# Altium PCB PCB_W-F-FC-H2XX.PcbDoc
Units mm, origin at the board's own origin, x right, y up, seen from the top; angles counter-clockwise.
Board outline 159.5 x 29.5 mm, 2 copper layers (Top Layer, Bottom Layer); 43 components, 36 nets, 115 pads, 12 vias.
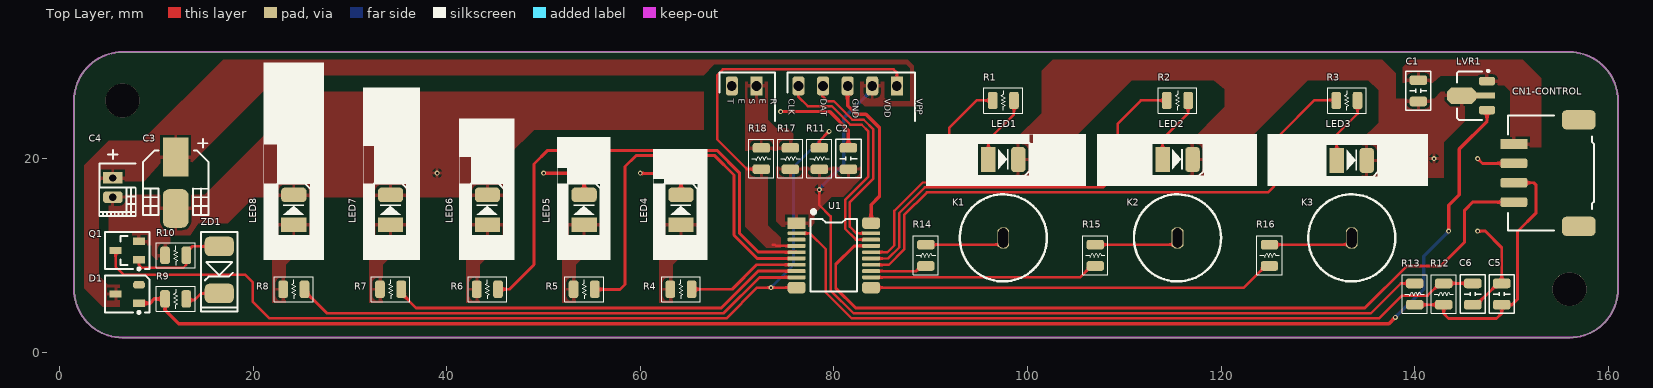
[diagram p0: Top Layer view]
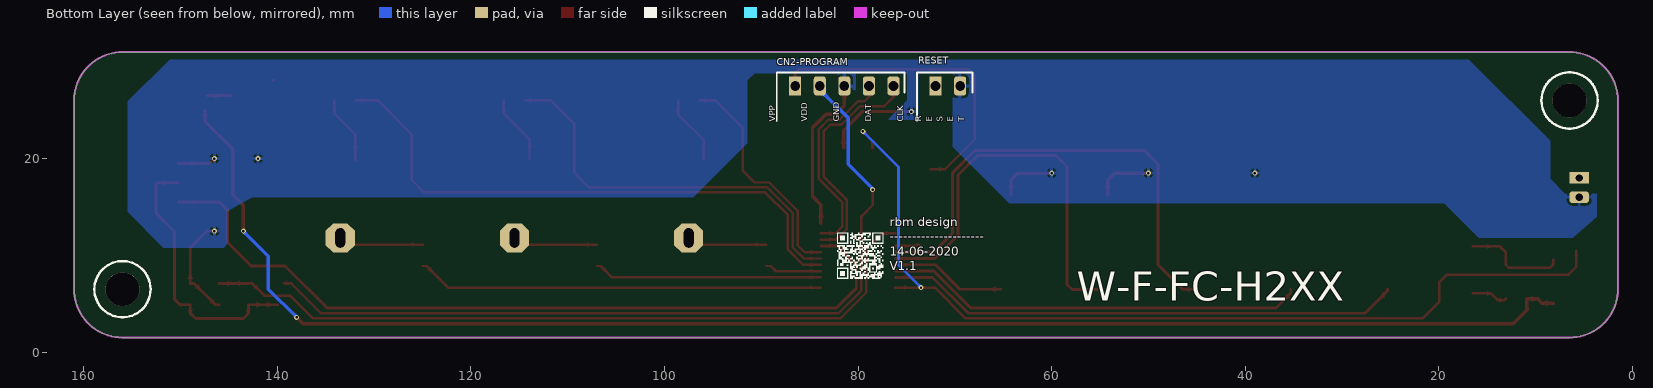
[diagram p1: Bottom Layer view, seen from below]
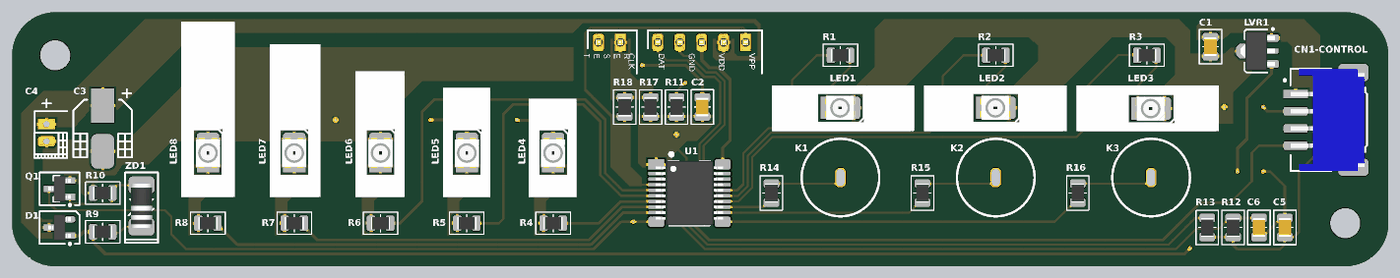
[diagram p2: 3D render of the assembled board from above, using the file's embedded part models]

## Layer stack, top to bottom
Top Solder: solder mask 0.0102, Solder Resist, Dk 3.5
Top Layer: signal copper 0.0356
Dielectric 1: dielectric 0.32, FR-4, Dk 4.8
Bottom Layer: signal copper 0.0356
Bottom Solder: solder mask 0.0102, Solder Resist, Dk 3.5

## Board outline
1.5,6.5 ccw(c6.5,6.5) 6.5,1.5 156,1.5 ccw(c156,6.5) 161,6.5 161,26 ccw(c156,26) 156,31 6.5,31 ccw(c6.5,26) 1.5,26

## Design rules (kind name [scope] priority, off if disabled: settings)
Clearance [All] p1: gap=0.254 ignorepadtopadclearanceinfootprint=FALSE except(0: Arc-Hole Track-Hole SMDPad-Hole THPad-Hole Via-Hole Fill-Hole Poly-Hole Region-Hole Text-Hole)
HoleSize [All] p1: absolutevalues=TRUE maxlimit=4 minlimit=0.025 maxpercent=80.000 minpercent=20.000
PlaneConnect [All] p1: planeconnectstyle=Relief reliefexpansion=0.508 reliefentries=4 reliefconductorwidth=0.35 reliefairgap=0.254
PolygonConnect [All] p1: connectstyle=Relief reliefconductorwidth=0.35 reliefentries=4 polygonreliefangle="90 Angle" airgapwidth=0.254
RoutingVias [All] p1: holewidth=0.254 width=0.5 viastyle="Through Hole" minholewidth=0.254 minwidth=0.5 maxholewidth=0.711 maxwidth=1.27
SolderMaskExpansion [All] p1: expansion=0.102 istentingtop=FALSE
UnRoutedNet [All] p1: checkbadconnections=TRUE
Width [All] p1: maxlimit=2 minlimit=0.254 preferedwidth=0.3 minimp=50.000000 maximp=50.000000 favimp=50.000000
27 further rules are at their usual default settings.

## Components (designator, comment, footprint, x,y, rotation, side; value= is the part's Value field where it differs from the comment)
C1 "0.33uF 25V 10%" C_0805 140.381,27 r270 top
C2 "0.1uF 16V 10%" C_0805 81.5,20 r90 top locked
C3 "100uF 16VDC 20%" C_SMD_6.3X5.4_CK-100UF-16V 12,17.5 r270 top
C4 "100uF 16VDC 20%" C_RADIAL_P2_RIGHT_ANGLE_WITHOUT_3D 5.5,17 r270 top
C5 "0.1uF 16V 10%" C_0805 149,6 r270 top locked
C6 "0.1uF 16V 10%" C_0805 146,6 r90 top locked
CN1-CONTROL "2mm 4Pins" CN_4P_A2001WR-S-XP-LCP 153,18.5 r0 top (schematic designator CN1)
CN2-PROGRAM "2.54mm Pins" CN_PIC_MCU_DEBUGGER_STRAIGHT 86.5,27.5 r90 bottom locked (schematic designator CN2)
D1 "If=200mA" D_SOT-23-3_200MA 7,6 r90 top locked
K1 "CapTouch Spring" K_TOUCHSPRING-12H-9W-0.6&1.3D 97.5,11.8 r0 top locked
K2 "CapTouch Spring" K_TOUCHSPRING-12H-9W-0.6&1.3D 115.5,11.8 r0 top locked
K3 "CapTouch Spring" K_TOUCHSPRING-12H-9W-0.6&1.3D 133.5,11.8 r0 top locked
LED1 "ICE-BLUE 3.2V 20mA" LED_SMD3528 97.5,19.9 r0 top locked
LED2 "BLUE 3.2V 20mA" LED_SMD3528 115.5,19.9 r0 top locked
LED3 "ORANGE 3.2V 20mA" LED_SMD3528 133.5,19.812 r0 top locked
LED4 "ICE-BLUE 3.2V 20mA" LED_SMD3528 64.2,14.7 r90 top locked
LED5 "ICE-BLUE 3.2V 20mA" LED_SMD3528 54.2,14.7 r90 top locked
LED6 "ICE-BLUE 3.2V 20mA" LED_SMD3528 44.2,14.7 r90 top locked
LED7 "ICE-BLUE 3.2V 20mA" LED_SMD3528 34.2,14.7 r90 top locked
LED8 "ICE-BLUE 3.2V 20mA" LED_SMD3528 24.2,14.7 r90 top locked
LVR1 "+5VDC 100mA" U_CJ78L05_SOT89 145.676,26.5 r180 top
Q1 "NPN 200mA" Q_SOT-23-3_NPN_BC847 7,10.5 r90 top locked
R1 "120Ω 1/8W 5%" R_0805 97.5,26 r0 top locked
R2 "120Ω 1/8W 5%" R_0805 115.5,26 r0 top locked
R3 "120Ω 1/8W 5%" R_0805 133,26 r0 top locked
R4 "120Ω 1/8W 5%" R_0805 64.2,6.5 r180 top locked
R5 "120Ω 1/8W 5%" R_0805 54.2,6.5 r180 top locked
R6 "120Ω 1/8W 5%" R_0805 44.2,6.5 r180 top locked
R7 "120Ω 1/8W 5%" R_0805 34.2,6.5 r180 top locked
R8 "120Ω 1/8W 5%" R_0805 24.2,6.5 r180 top locked
R9 "1KΩ 1/8W 5%" R_0805 12,5.5 r0 top locked
R10 "47KΩ 1/8W 5%" R_0805 12,10 r180 top locked
R11 "4.7KΩ 1/8W 5%" R_0805 78.5,20 r90 top locked
R12 "1KΩ 1/8W 5%" R_0805 143,6 r90 top locked
R13 "10KΩ 1/8W 1%" R_0805 140,6 r270 top locked
R14 "1KΩ 1/8W 5%" R_0805 89.5,10 r270 top locked
R15 "1KΩ 1/8W 5%" R_0805 107,10 r270 top locked
R16 "1KΩ 1/8W 5%" R_0805 125,10 r270 top locked
R17 "4.7KΩ 1/8W 5%" R_0805 75.5,20 r90 top locked
R18 "1KΩ 1/8W 5%" R_0805 72.5,20 r90 top locked
RESET "2P 2.54mm Male Connector" CN_PIC_MCU_RESETER_STRAIGHT 72,27.5 r90 bottom locked (schematic designator RE)
U1 "PIC16F18346T-I/SS" U_PIC_20PIN_SSOP 80,10 r0 top
ZD1 "4.3Vz 1W 217mA 5%" "ZD_ZM4742A LL-41" 16.5,8.5 r90 top locked

## Footprints (in the part's own frame and the unit in brackets; to place one, negate y for a bottom-side part, rotate by r counter-clockwise, add the part's x,y. Pads: shape width x height; smd on the part's side, far side on the other; paste and mask are expansions set on the pad)
C_0805 [mm]
  rrect50% 1x1.8 smd: 1(-1.1,0) 2(1.1,0)
  silkscreen extent -2,-1.3 2,1.3, body extent -1.1,-0.72 1.1,0.73, height 1
C_RADIAL_P2_RIGHT_ANGLE_WITHOUT_3D [mm] "Ø5*11mm 2mm Pitch RA"
  rect 1.2x2 hole 0.75: 1(-1,0)
  rrect50% 1.2x2 hole 0.75: 2(1,0)
  silkscreen extent -3.87,-1.4 2.93,2.37
C_SMD_6.3X5.4_CK-100UF-16V [mm] "Aluminum Electrolytic Capacitor, Body 6.60x6.70x6.00mm, IPC Low Density"
  rect 4x2.65 smd: 1(-2.65,0)
  rrect50% 4x2.65 smd: 2(2.65,0)
  silkscreen extent -4.55,-3.4 3.35,3.4, body extent -3.4,-3.4 3.4,3.4, height 5.8
CN_4P_A2001WR-S-XP-LCP [mm]
  rrect50% 3.5x2 smd: 0(3.95,-5.5) 0(3.95,5.5)
  rect 2.8x1 smd: 1(-2.75,3)
  rrect50% 2.8x1 smd: 2(-2.75,1) 3(-2.75,-1) 4(-2.75,-3)
  round 0.5 on Top Overlay: ""(-4,4.6)
  silkscreen extent -3.35,-5.94 5.51,5.95, body extent -3.35,-5.95 5.25,5.95, height 5.6
CN_PIC_MCU_DEBUGGER_STRAIGHT [mm] "2.54mmPitch, 5pins, StraightType, Male Connector"
  rect 2x1.25 hole 1: 1(0,0)
  rrect50% 2x1.25 hole 1: 2(0,-2.54) 3(0,-5.08) 4(0,-7.62) 5(0,-10.16)
  silkscreen extent -3.6,-11.3 1.4,1.91, body extent -1.24,-11.43 1.25,1.27, height 8.54
CN_PIC_MCU_RESETER_STRAIGHT [mm] "2.54mmPitch, 2pins, StraightType, Male Connector"
  rect 2x1.25 hole 1: 1(0,0)
  rrect50% 2x1.25 hole 1: 2(0,-2.54)
  silkscreen extent -3.6,-3.8 1.4,1.91, body extent -1.24,-3.81 1.25,1.27, height 8.54
D_SOT-23-3_200MA [mm] "Diodes - General Purpose 100V 200mA 1.25V @ 200mA SOT-23(SOT-23-3) RoHS"
  oct 0.75x1.25 smd: 0(0.95,-1.2)
  rect 0.75x1.25 smd: 1(-0.95,-1.2) 2(0,1.2)
  silkscreen extent -2.02,-2.3 1.9,2.3, body extent -1.5,-1.3 1.5,1.3, height 1.15
K_TOUCHSPRING-12H-9W-0.6&1.3D [mm]
  oct 1.2x2.2 / inner oct 1x1 / far side oct 3x3 hole 2 slot 1 at 0 deg: 1(0,0)
  silkscreen extent -4.5,-4.5 4.5,4.5, body extent -4.5,-4.5 4.5,4.5, height 12
LED_SMD3528 [mm]
  rect 1.5x2.6 smd: 1(-1.55,0)
  rrect50% 1.5x2.6 smd: 2(1.55,0)
  silkscreen extent -2.7,-1.7 2.7,1.7, body extent -1.8,-1.4 1.7,1.4, height 1.95
Q_SOT-23-3_NPN_BC847 [mm] "SOT23, 3-Leads, Body 2.90x2.45mm, Pitch 0.95mm, IPC Medium Density"
  rect 0.75x1.25 smd: 1(-0.95,-1.2) 2(0.95,-1.2) 3(0,1.2)
  silkscreen extent -2.02,-2.3 1.9,2.3, body extent -1.5,-1.3 1.5,1.3, height 1.15
R_0805 [mm]
  rrect50% 1x1.8 smd: 1(-1.1,0) 2(1.1,0)
  silkscreen extent -2,-1.3 2,1.3, body extent -1.1,-0.72 1.1,0.73, height 0.65
U_CJ78L05_SOT89 [mm] "SOT89, 3-Leads, Body 4.50x2.45mm, Pitch 1.50mm, Lead Span 4.1mm - Reverse Pinning, IPC Medium Density"
  rrect50% 1.65x0.9 smd: 1(-1.8,1.5) 3(-1.8,-1.5)
  rect 2x0.6 smd: 2(-1.6,0)
  oct 3x1.7 smd: 2(0.823,0)
  silkscreen extent -2.03,-2.65 1.32,2.5, body extent -2.2,-2.3 1.8,2.3, height 1.6
U_PIC_20PIN_SSOP [mm] "SOP, 20-Leads, Body 7.20x5.30mm, Pitch 0.65mm, IPC Medium Density"
  rect 1.85x1.2 smd mask+0.2: 1(-3.85,3.33)
  rrect50% 1.85x0.395 smd mask+0.2: 2(-3.85,2.275) 3(-3.85,1.625) 4(-3.85,0.975) 5(-3.85,0.325) 6(-3.85,-0.325) 7(-3.85,-0.975) 8(-3.85,-1.625) 9(-3.85,-2.275) 12(3.85,-2.275) 13(3.85,-1.625) 14(3.85,-0.975) 15(3.85,-0.325) 16(3.85,0.325) 17(3.85,0.975) 18(3.85,1.625) 19(3.85,2.275)
  rrect50% 1.85x1.2 smd mask+0.2: 10(-3.85,-3.33) 11(3.85,-3.33) 20(3.85,3.33)
  silkscreen extent -2.4,-3.75 2.4,4.62, body extent -3.9,-3.75 3.9,3.75, height 2
"ZD_ZM4742A LL-41" [mm]
  rrect50% 2x3 smd: 1(-2.425,0) 2(2.425,0)
  silkscreen extent -4.3,-1.9 3.9,1.9, body extent -2.57,-1.23 2.58,1.23, height 2.46

## Part data
C1 C2 C5 C6: library part "Capacitor Non-Polar", "Multilayer Ceramic Capacitors, SMD 0805"
C3: library part "Capacitor Polar", "Aluminum Electrolytic Capacitor, SMD ØDxL=6.3x5.4mm"
C4: library part "Capacitor Polar", "Aluminum Electrolytic Capacitor, Through Hole, ØDxL=5*11mm Pitch=2mm"
CN1-CONTROL: library part Connector_4PINs, "A2001WR-S-XP-LCP"
CN2-PROGRAM: library part Connector_PIC_Burn
D1: library part Diode, "BAS19"
K1 K2 K3: library part Touch_Spring, "ØDxL=9x12mm LeadDia=0.6mm"
LED1 LED4 LED5 LED6 LED7 LED8: library part LED, "WEJT28AC0-E74P01, SMD 3528"
LED2: library part LED, "WEJT28ABV-BCDP01, SMD 3528"
LED3: library part LED, "WEJT28AAV-6ACP01, SMD 3528"
LVR1: library part "Voltage Regulator", "SOT-89-3L Plastic-Encapsulate Voltage Regulator"
Q1: library part BJT_npn, "BC847, SOT-23-3"
R1 R2 R3 R4 R5 R6 R7 R8 R9 R10 R11 R12 R13 R14 R15 R16 R17 R18: library part Resistor, "Chip-Resistor, SMD 0805, , RoHS"
RESET: library part Connector_2PINs
U1: library part IC_PIC_20pins
ZD1: library part "Zener Diode", "ZM4731, MELF SILICON PLANAR POWER ZENER DIODES, LL-41"

## Free pads (board coordinates)
  round 3.5 hole 3.5 unplated: 0(6.5,26) 0(156,6.5)

## Via types
v1: diameter 0.5, hole 0.254, Top Layer to Bottom Layer, 12 vias

## Nets (pads, with @x,y where several pads share a name; then routed paths per layer and width w, separated by ;. In a path a pad name is that pad's centre, name@x,y a point inside that pad or via, vN(x,y) a via of type N, cw(c..) or ccw(c..) an arc to the next point about the centre after c; other vN are vias at no path point)
+5V: D1.1 LVR1.1 R9.1 | length 157.3
  Top Layer w0.35: D1.1 9.35,5.05 9.8,5.5 R9.1 10.9,4.34 12.309,2.931 137.348,2.931 v1(138.011,3.594) ; v1(143.508,12.5) 143.508,15.176 144.588,16.256 144.588,20.987 147.476,23.875 LVR1.1
  Bottom Layer w0.35: v1(138.011,3.594) 140.919,6.503 140.919,9.911 v1(143.508,12.5)
+12V: C1.1 CN1-CONTROL.1 LVR1.3 | length 0.1
  Top Layer w0.3: C1.1 C1.1@140.431,28.05
_BOOST_COOL: R2.1 U1.15 | length 42.4
  Top Layer w0.254: U1.15 85.608,9.675 86.749,10.816 86.749,14.376 89.39,17.018 107.823,17.018 109.347,18.542 109.347,23.622 111.725,26 R2.1
_E_SAVE: Q1.3 R11.2 U1.10 | length 97.5
  Top Layer w0.254: Q1.3 5.8,8.805 6.604,8.001 19.177,8.001 19.939,7.239 19.939,5.226 21.678,3.487 68.892,3.487 72.075,6.67 v1(73.5,6.67) U1.10
  Top Layer w0.3: R11.2 78.5,21.825 79.475,22.8 v1(79.5,22.8)
  Bottom Layer w0.3: v1(73.5,6.67) 75.819,8.989 75.819,19.119 v1(79.5,22.8)
_K1: R14.2 U1.13 | length 5.9
  Top Layer w0.254: U1.13 88.508,8.375 89.033,8.9 R14.2
_K2: R15.2 U1.12 | length 23.6
  Top Layer w0.254: U1.12 105.425,7.725 106.6,8.9 R15.2
_K3: R16.2 U1.11 | length 42.1
  Top Layer w0.254: U1.11 122.37,6.67 124.6,8.9 R16.2
_LEVEL_1: R4.1 U1.7 | length 11.9
  Top Layer w0.3: R4.1 69.492,6.5 72.017,9.025 U1.7
_LEVEL_2: R5.1 U1.6 | length 41.8
  Top Layer w0.3: R5.1 55.323,6.477 57.912,6.477 58.42,6.985 58.42,19.177 59.539,20.296 67.691,20.296 69.677,18.31 69.677,12.083 72.085,9.675 U1.6
_LEVEL_3: R6.1 U1.5 | length 50.9
  Top Layer w0.3: R6.1 46.484,6.5 49.022,9.038 49.022,19.431 50.441,20.85 67.92,20.85 70.231,18.539 70.231,12.313 72.219,10.325 U1.5
_LEVEL_4: R7.1 U1.8 | length 43.5
  Top Layer w0.3: R7.1 35.3,6.102 36.83,4.572 68.372,4.572 72.175,8.375 U1.8
_LEVEL_5: R8.1 U1.9 | length 53.5
  Top Layer w0.3: R8.1 25.3,6.342 27.624,4.018 68.601,4.018 72.308,7.725 U1.9
_MOTOR: CN1-CONTROL.4 U1.17 | length 84.3
  Top Layer w0.3: U1.17 82.094,10.975 80.195,9.076 80.195,6.601 82.247,4.549 134.851,4.549 139.202,8.9 142.692,8.9 145.167,11.375 145.167,14.667 146,15.5 CN1-CONTROL.4
_SEN: C6.2 R12.2 U1.2 | length 77.6
  Top Layer w0.254: U1.2 77.521,12.275 79.156,10.64 79.156,6.171 81.84,3.487 136.329,3.487 138.684,5.842 141.342,5.842 142.6,7.1 R12.2
  Top Layer w0.3: R12.2 C6.2
_SET_LEVEL: R1.1 U1.16 | length 23.7
  Top Layer w0.254: U1.16 85.539,10.325 86.241,11.026 86.241,14.587 89.18,17.526 90.695,17.526 91.899,18.73 91.899,23.157 94.742,26 R1.1
_SYSTEM_LOCK: R3.1 U1.14 | length 59.9
  Top Layer w0.254: U1.14 85.676,9.025 87.257,10.606 87.257,14.166 89.601,16.51 124.841,16.51 126.111,17.78 126.111,22.479 129.667,26.035 131.865,26.035 R3.1
CLK: CN2-PROGRAM.5 U1.18 | length 24.1
  Top Layer w0.254: CN2-PROGRAM.5 76.34,26.369 77.294,25.415 79.78,25.415 81.7,23.495 82.878,23.495 83.566,22.807 83.566,18.135 81.153,15.722 81.153,12.742 82.27,11.625 U1.18
DAT: CN2-PROGRAM.4 U1.19 | length 21.3
  Top Layer w0.254: CN2-PROGRAM.4 78.812,27.432 78.812,26.449 79.338,25.923 79.99,25.923 81.91,24.003 83.088,24.003 84.074,23.017 84.074,17.925 81.661,15.512 81.661,12.953 82.339,12.275 U1.19
GND: C1.2 C2.2 C3.2 C4.2 C5.1 C6.1 CN1-CONTROL.2 CN2-PROGRAM.3 LED1.2 LED2.2 LED3.2 LED4.2 LED5.2 LED6.2 LED7.2 LED8.2 LVR1.2 Q1.2 R10.2 RESET.2 U1.20 | length 55.3
  Top Layer w0.3: LVR1.2@144.854,26.5 LVR1.2@147.276,26.5 ; C6.1 146.4,4.9 148.6,7.1 C5.1 149,10.794 147.294,12.5 v1(146.5,12.5) ; v1(146.5,20) 147,19.5 CN1-CONTROL.2
  Top Layer w0.35: v1(50,18.5) 53.484,18.5 54.2,17.784 LED5.2 ; v1@60,18.453 63.568,18.453 64.2,17.821 LED4.2 ; v1@74.549,24.859 79.55,24.859 81.5,22.908 C2.2 ; CN2-PROGRAM.3 81.42,25.446 82.307,24.559 83.318,24.559 84.709,23.168 84.709,16.099 83.85,15.24 U1.20
  other v1: 39,18.5 60,18.5 142,20 74.5,24.85
NetK1_1: K1.1 R14.1 | length 8.4
  Top Layer w0.254: R14.1 97.027,11.1 97.5,11.573 K1.1
NetK2_1: K2.1 R15.1 | length 8.9
  Top Layer w0.254: R15.1 115.027,11.1 115.5,11.573 K2.1
NetK3_1: K3.1 R16.1 | length 8.9
  Top Layer w0.254: R16.1 133.027,11.1 133.5,11.573 K3.1
NetLED1_1: LED1.1 R1.2 | length 7.2
  Top Layer w0.254: LED1.1 95.95,21.909 98.6,24.559 R1.2
NetLED2_1: LED2.1 R2.2 | length 7.2
  Top Layer w0.254: LED2.1 113.95,22.002 116.6,24.652 R2.2
NetLED3_1: LED3.1 R3.2 | length 7.1
  Top Layer w0.254: LED3.1 131.95,22.479 134.1,24.629 R3.2
NetLED4_1: LED4.1 R4.2
NetLED5_1: LED5.1 R5.2
NetLED6_1: LED6.1 R6.2
NetLED7_1: LED7.1 R7.2
NetLED8_1: LED8.1 R8.2
NetQ1_1: Q1.1 R10.1 ZD1.2 | length 10.6
  Top Layer w0.254: Q1.1 8.2,9.017 8.498,8.719 12.783,8.719 13.1,9.036 R10.1 13.1,10.333 13.692,10.925 ZD1.2
NetR9_2: R9.2 ZD1.1 | length 3.7
  Top Layer w0.254: R9.2 13.225,5.375 13.927,5.375 14.627,6.075 ZD1.1
NetR17_2: R17.2 R18.2 RESET.1
SEN: C5.2 CN1-CONTROL.3 R12.1 R13.2 | length 28.1
  Top Layer w0.3: R13.2 R12.1 143,3.995 143.508,3.487 148.463,3.487 149,4.024 C5.2 150.061,4.9 150.622,5.461 150.622,12.472 152.553,14.403 152.553,17.246 152.299,17.5 CN1-CONTROL.3
VDD: C2.1 C3.1 C4.1 CN2-PROGRAM.2 D1.2 R11.1 R13.1 R17.1 U1.1 | length 85.8
  Top Layer w0.254: v1@78.486,16.891 78.486,15.207 79.664,14.029 79.664,6.381 82.027,4.018 135.486,4.018 138.568,7.1 R13.1@139.307,7.1
  Bottom Layer w0.35: v1@78.486,16.891 81.026,19.431 81.026,24.191 83.96,27.125 CN2-PROGRAM.2
  other v1: 78.5,16.8
VPP: CN2-PROGRAM.1 R18.1 U1.4 | length 35.3
  Top Layer w0.254: R18.1 71.016,18.9 67.945,21.971 67.945,28.627 68.528,29.21 86.171,29.21 86.5,28.881 CN2-PROGRAM.1 ; 73.664,11.1 73.916,11.1 74.041,10.975 U1.4
pads on no net: CN1-CONTROL. CN1-CONTROL.0 D1.0 U1.3

## Polygon pours and split planes (outlines as drawn)
+12V on Top Layer "Top Layer-+12V" (solid, pour order 28): 138.767,29.43 139.564,30.226 151.156,30.226 153.084,28.298 153.084,21.19 149.86,21.19 149.86,26.961 149.262,27.559 148.209,27.559 147.193,28.575 142.683,28.575 141.853,27.825 138.767,27.825
GND on Top Layer "Top Layer-GND 1" (solid, pour order 26): 98.806,22.032 101.473,24.699 101.473,29.083 102.616,30.226 107,30.226 136.652,30.226 138.049,28.829 138.049,26.2 142.003,26.2 142.683,26.879 145.167,26.879 145.167,26.2 145.167,23.836 143.002,21.671 143.002,18.034 139.365,18.034 134.493,18.034 134.493,21.922 136.271,23.7 136.271,27.051 135.222,28.1 128.938,28.1 118.872,18.034 116.6,18.034 116.6,21.552 120.396,25.348 120.396,27.178 119.253,28.1 110.777,28.1 100.711,18.034 98.806,18.034
VDD on Top Layer "Top Layer-VDD" (solid, remove dead copper, pour order 22): 6.2,6.95 6.2,4.699 4.453,4.699 2.54,6.612 2.54,19.304 5.08,21.844 8.509,21.844 16.891,30.226 87.63,30.226 88.265,29.591 88.265,25.4 83.164,25.4 82.699,25.807 82.699,27.94 85.217,27.94 85.217,26.302 85.598,25.921 87.884,25.921 87.884,29.347 87.498,29.718 67.659,29.718 66.568,28.627 22.696,28.627 13.627,19.558 10.453,19.558 8.763,17.653 4.064,17.653 4.064,7.874 4.988,6.95
VDD on Top Layer "Top Layer-VDD 1" (solid, remove dead copper, pour order 20): 77.64,12.954 74.613,12.954 74.041,13.526 74.041,19.15 82.878,19.15 82.878,17.975 80.968,16.065 79.793,16.065 77.978,14.25 77.978,13.292
GND on Top Layer "Top Layer-GND" (solid, remove dead copper, pour order 18): 11.43,12.067 13.484,12.067 14.34,13.335 17.399,13.335 20.064,16 46.481,16 46.481,20.446 49.022,22.987 66.568,22.987 66.568,26.924 25.654,26.924 14.98,16.25 13.283,16.25 5.08,16.25 5.08,12.446 7.493,12.446 7.493,11.049 9.525,11.049 9.525,10 9.975,9.55 11.43,9.55
NetLED8_1 on Top Layer "Top Layer-NetLED8_1" (solid, remove dead copper, pour order 14): 21.971,13.33 26.415,13.33 26.418,12.067 23.368,9.017 23.368,5.08 21.971,5.08
NetLED7_1 on Top Layer "Top Layer-NetLED7_1" (solid, remove dead copper, pour order 12): 32.004,13.33 36.448,13.33 36.451,12.067 33.401,9.017 33.401,5.08 32.004,5.08
NetLED6_1 on Top Layer "Top Layer-NetLED6_1" (solid, remove dead copper, pour order 10): 42.037,13.33 46.481,13.33 46.484,12.067 43.434,9.017 43.434,5.08 42.037,5.08
NetLED5_1 on Top Layer "Top Layer-NetLED5_1" (solid, remove dead copper, pour order 8): 51.943,13.33 56.387,13.33 56.39,12.067 53.34,9.017 53.34,5.08 51.943,5.08
NetLED4_1 on Top Layer "Top Layer-NetLED4_1" (solid, remove dead copper, pour order 6): 61.976,13.33 66.42,13.33 66.423,12.067 63.373,9.017 63.373,5.08 61.976,5.08
VPP on Top Layer "Top Layer-VPP" (solid, remove dead copper, pour order 4): 70.866,19.177 73.152,19.177 73.152,13.131 74.487,11.797 74.487,10.795 73.025,10.795 70.866,12.954
NetR17_2 on Top Layer "Top Layer-NetR17_2" (solid, pour order 2): 75.819,20.828 70.866,20.828 70.866,27.94 73.152,27.94 73.152,24.003 74.041,23.114 75.246,23.114 75.819,22.541
GND on Bottom Layer "Bottom Layer-GND" (solid, remove dead copper, pour order 24): 3.683,16.383 6.985,16.383 8.509,17.907 8.509,21.844 16.891,30.226 20.828,30.226 151.13,30.226 155.448,25.908 155.448,14.478 151.765,10.795 145.542,10.795 145.161,11.176 145.161,14.553 142.614,16.002 97.028,16.002 91.44,21.59 91.44,28.067 90.678,28.829 82.169,28.829 82.169,27.125 80.264,27.125 80.264,28.702 80.137,28.829 74.93,28.829 74.93,26.048 76.975,24.003 74.168,24.003 73.787,24.384 73.787,28.829 70.231,28.829 70.231,21.209 64.389,15.367 19.431,15.367 15.875,11.811 6.176,11.811 3.683,14.006

## Keep-outs
Keep-Out Layer:
  lines w0.2: 1.5,6.477 1.5,26 cw(c6.5,26) 6.5,31 156,31 cw(c156,26) 161,26 161,6.477 ; 1.5,6.5 ccw(c6.5,6.5) 6.5,1.5 156,1.5 ccw(c156,6.5) 161,6.5

## Silkscreen, mask and mechanical layers (free items; w line width, h text height)
Top Overlay:
  region: 136.2,22.523 141.351,22.523 141.351,17.189 124.841,17.189 124.841,22.523 136.2,22.523 136.2,21.556 130.8,21.556 130.8,18.112 136.2,18.112
  region: 118.237,22.523 123.698,22.523 123.698,17.189 107.188,17.189 107.188,22.523 118.237,22.523 118.237,21.6 112.8,21.6 112.8,18.2 118.237,18.2
  region: 100.2,22.523 106.045,22.523 106.045,17.189 89.535,17.189 89.535,22.523 100.584,22.523 100.584,21.6 94.8,21.6 94.8,18.2 100.2,18.2
  region: 61.341,17.399 61.341,20.955 66.929,20.955 66.929,9.525 61.341,9.525 61.341,17.907 62.484,17.907 62.484,12.065 65.913,12.065 65.913,17.399
  region: 51.435,17.399 51.435,22.225 56.896,22.225 56.896,9.525 51.435,9.525 51.435,19.05 52.451,19.05 52.451,12.065 55.88,12.065 55.88,17.399
  region: 41.275,17.399 41.275,24.13 46.99,24.13 46.99,9.525 41.275,9.525 41.275,20.193 42.545,20.193 42.545,12.065 45.847,12.065 45.847,17.399
  region: 21.082,17.399 21.082,29.908 27.305,29.909 27.305,9.525 21.082,9.525 21.082,21.463 22.479,21.463 22.479,12.065 25.908,12.065 25.908,17.399
  region: 31.369,17.399 31.369,27.305 37.211,27.305 37.211,9.525 31.369,9.525 31.369,21.336 32.512,21.336 32.512,12.065 35.814,12.065 35.814,17.399
Bottom Overlay:
  drawing of 46 lines, arcs and shapes, not listed
  text "rbm design / --------------------- / 14-06-2020 / V1.1" at 76.721,8.144 h1.52
  text "W-F-FC-H2XX" at 57.404,5.334 h3

## Text inside footprints (layer, text, board x,y; h text height)
CN2-PROGRAM: Top Overlay "VPP /  /  / VDD /  /  / GND /  /  / DAT /  /  / CLK" at 75.1,26.2 h1.1 r270; Bottom Overlay "VPP /  /  / VDD /  /  / GND /  /  / DAT /  /  / CLK" at 75.1,23.8 h1.1 r270
RESET: Top Overlay "R / E / S / E / T" at 68.8,26.2 h1.1 r270; Bottom Overlay "R / E / S / E / T" at 68.8,23.8 h1.1 r270